# EAGLE board logic (EAGLE 9.2.2)
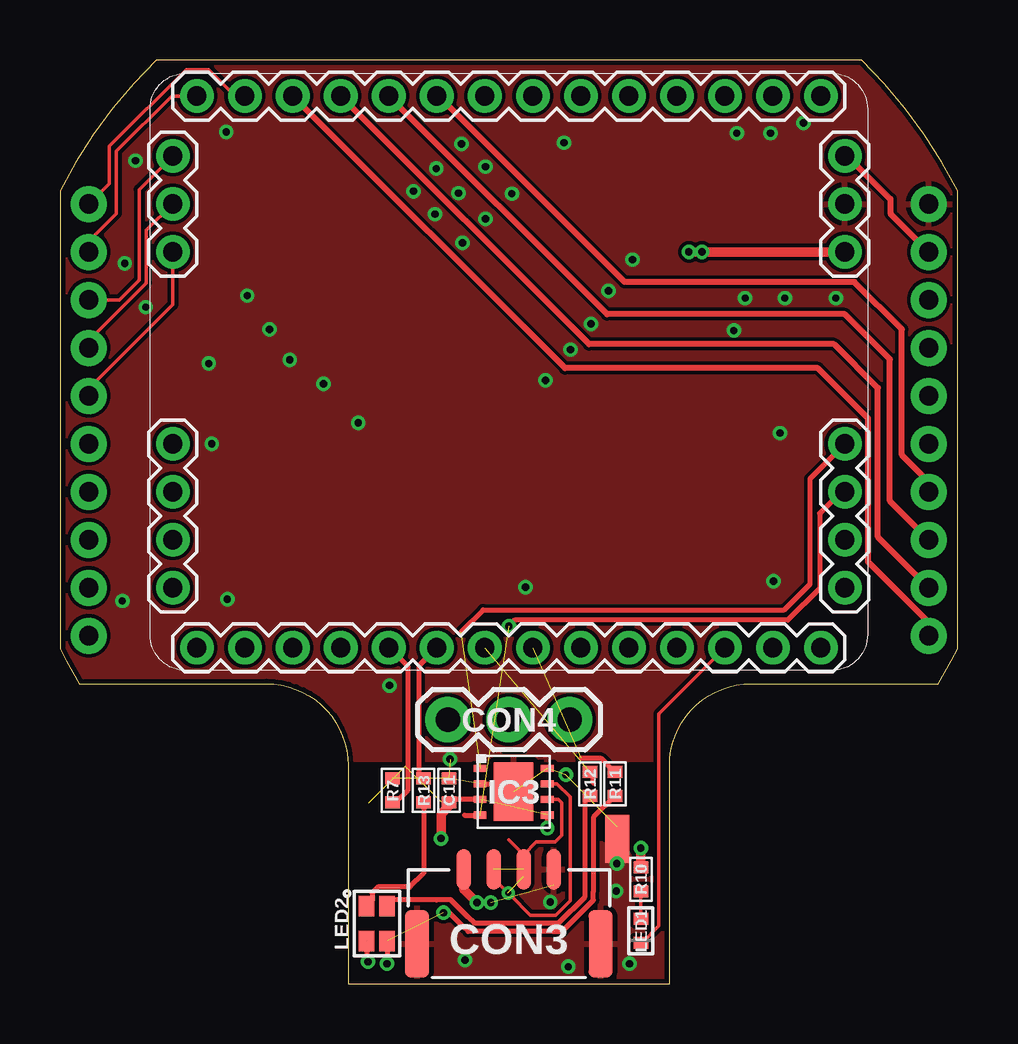
[diagram p0: board, top side]
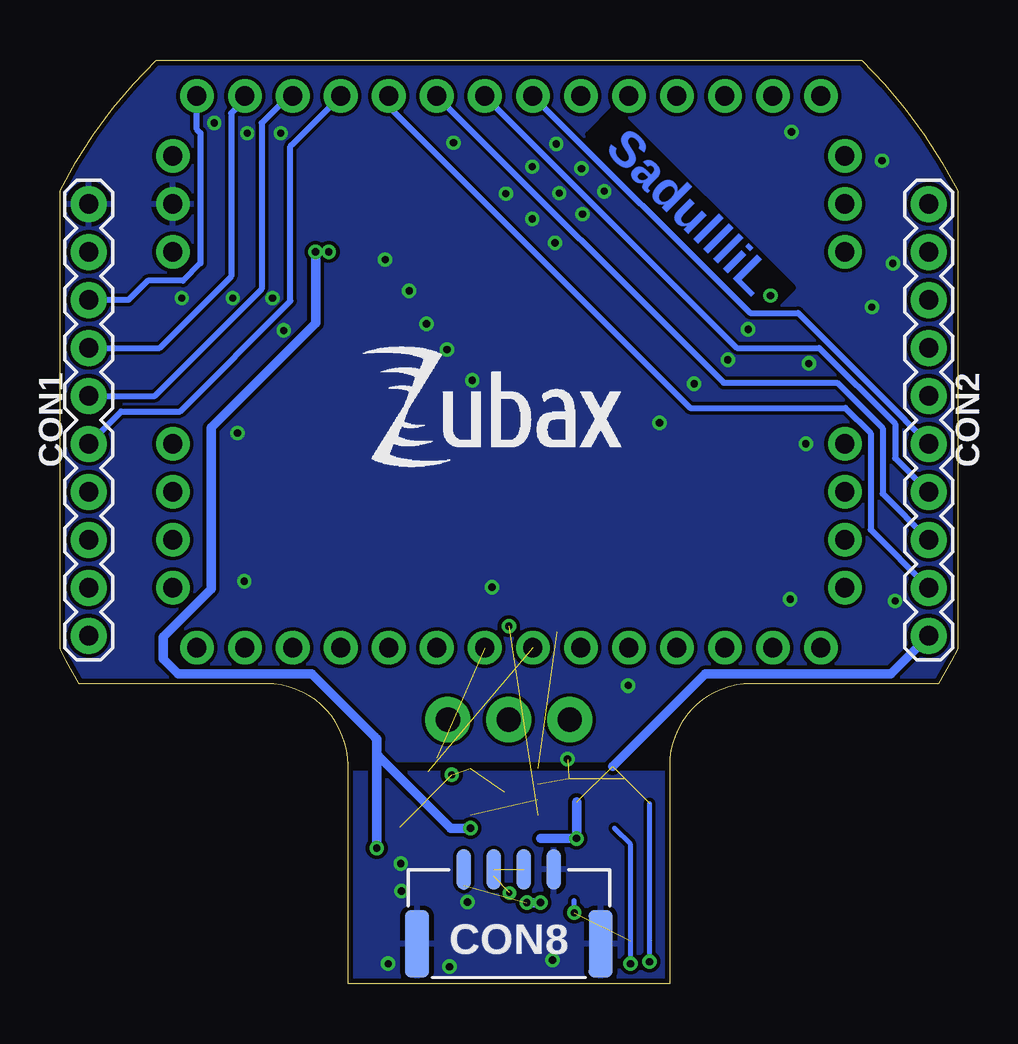
[diagram p1: board, bottom side, seen from below]

Size 37.4 x 38.5 mm. Coordinates in mm from the lower left corner, seen from the top.
Outline: 12,9.1 12,0 25.4,0 25.4,9.1 arc-90 28.8,12.5 36.59,12.5 arc5 37.4,13.94 37.4,33.06 arc19 33.4,38.5 4,38.5 arc19 0,33.06 0,13.94 arc5 0.81,12.5 8.6,12.5 arc-90 12,9.1
Copper layers (1*16): Top 0.035mm / dielectric 0.5mm / Bottom 0.035mm
Design rules "myxa *": minimum track width 0.15mm, minimum drill 0.2mm, track to track 0.15mm, track to pad 0.15mm, pad to pad 0.15mm, via to via 0.15mm, smd to smd 0.15mm, copper to edge 0.2mm, drill to drill 0.2mm, minimum pad ring 0.125mm, minimum via ring 0.125mm, stop-mask expansion 1mil, vias tented up to drill 0.31mm, thermal gap 8mil
Net classes: 1 HV: clearance 0.25 mm to class 0, clearance 0.25 mm
tRestrict: 2 lines

## Footprints (pad centres in the part's own frame; a part is rotated, then mirrored left to right if it is on the bottom)
C0402 = smd 0.5 x 0.6: 1 -0.5,0; 2 0.5,0
1X10-PTH_2 = drill 0.8 pad 1.5: 1 -9,0; 2 -7,0; 3 -5,0; 4 -3,0; 5 -1,0; 6 1,0; 7 3,0; 8 5,0; 9 7,0; 10 9,0
JST_GH-4P-RA = smd 0.6 x 1.7: 1 1.875,-2.91; 2 0.625,-2.91; 3 -0.625,-2.91; 4 -1.875,-2.91 | smd 1 x 2.8: M$0 -3.825,0.19; M$1 3.825,0.19
1X03-PTH-2.54-RA = drill 1.016 pad 1.88: 1 -2.54,0; 2 0,0; 3 2.54,0
SOT782-1 = smd 0.525 x 0.3: 1 -1.4,0.975; 2 -1.4,0.325; 3 -1.4,-0.325; 4 -1.4,-0.975; 5 1.4,-0.975; 6 1.4,-0.325; 7 1.4,0.325; 8 1.4,0.975 | smd 1.65 x 2.45: PAD 0,0
0402_LED = smd 0.5 x 0.6: A 0.5,0; C -0.5,0
LITE_ON_RGB_LED = smd 0.65 x 0.85: + -0.425,-0.725; B 0.425,-0.725; G 0.425,0.725; R -0.425,0.725
MITOHONDRIQUE = drill 0.8 pad 1.4: 1 -5,14; 2 -7,14; 3 -9,14; 4 -11.5,13; 5 -11.5,11; 6 -11.5,9; 7 -11.5,7; 8 -11.5,5; 9 -11.5,3; 10 -11.5,1; 11 -11.5,-1; 12 -11.5,-3; 13 -11.5,-5; 14 -11.5,-7; 15 -11.5,-9; 16 -11.5,-11; 17 -11.5,-13; 18 -9,-14; 19 -7,-14; 20 -5,-14; 21 3,-14; 22 5,-14; 23 7,-14; 24 9,-14; 25 11.5,-13; 26 11.5,-11; 27 11.5,-9; 28 11.5,-7; 29 11.5,-5; 30 11.5,-3; 31 11.5,-1; 32 11.5,1; 33 11.5,3; 34 11.5,5; 35 11.5,7; 36 11.5,9; 37 11.5,11; 38 11.5,13; 39 9,14; 40 7,14; 41 5,14; 42 3,14
R0402 = smd 0.5 x 0.6: 1 -0.5,0; 2 0.5,0
CONNECTION = smd 1 x 1: P$1 -0.5,0; P$2 0.5,0

## Placement (x,y rotation side)
C11  0.1µF  [C0402]  16.2,8.05 90 top
CON1  PINHEAD_1X10-2  [1X10-PTH_2]  36.2,23.5 90 bottom
CON2  PINHEAD_1X10-2  [1X10-PTH_2]  1.2,23.5 270 bottom
CON3  CON-4P-JST_GH-RA  [JST_GH-4P-RA]  18.7,1.85 180 top
CON4  PINHEAD_1X03-2.54-RA  [1X03-PTH-2.54-RA]  18.7,11 0 top
CON8  CON-4P-JST_GH-RA  [JST_GH-4P-RA]  18.7,1.85 180 bottom
IC3  TJA1051  [SOT782-1]  18.9,8 0 top
LED1  GREEN  [0402_LED]  24.2,2.2 90 top
LED2  LTST-C19HE1WT  [LITE_ON_RGB_LED]  13.2,2.5 0 top
MODULE2  MITOHONDRIQUE-TH  [MITOHONDRIQUE]  18.7,25.5 270 top
R7  1K  [R0402]  13.85,8.05 90 top
R10  1K  [R0402]  24.2,4.35 90 top
R11  1K  [R0402]  23.12,8.32 90 top
R12  1K  [R0402]  22.07,8.32 90 top
R13  1K  [R0402]  15.15,8.05 90 top
U$1  [ZUBAX_LOGO_5X10]  24.88,21.35 0 bottom
U$2  CONNECTION  [CONNECTION]  23.23,6.02 270 top

## Library data of the parts
C11 = C_digikey; DIGIKEY#: 490-3261-1-ND; MANF: Murata Electronics North America; MANF#: GRM155R71C104KA88D; OPERATING_TEMP: -55°C ~ 125°C; PACKAGE: 0402; TC: X7R; TOLERANCE: +-10%; VOLTAGE: 16V
CON1 CON2 CON4 = pinhead
CON3 CON8 = Connectors; DIGIKEY#: 455-1566-1-ND; MANF: JST Sales America Inc; MANF#: SM04B-GHS-TB(LF)(SN)
IC3 = myxa_masterlib; DIGIKEY#: 568-8686-2-ND; MANF: NXP Semiconductors; MANF#: TJA1051TK/3,118
LED1 = myxa_masterlib; COLOR: GREEN; DIGIKEY#: 511-1652-1-ND; MANF: Rohm Semiconductor; MANF#: SML-P11MTT86
LED2 = myxa_masterlib; DIGIKEY#: 160-2162-1-ND; MANF: Lite-On Inc; MANF#: LTST-C19HE1WT
MODULE2 = zubax_modules; MANF: Zubax Robotics; MANF#: Mitochondrik
R7 R10-R13 = R_digikey; DIGIKEY#: 311-1.00KLRCT-ND; MANF: Yageo; MANF#: RC0402FR-071KL; PACKAGE: 0402; TOLERANCE: 1%
U$1 = pixhawk_esc_1.5_master_lib
U$2 = usb2can_master_lib; BOM: EXCLUDE

## Nets
CAN1_LED: LED1.C MODULE2.36
CAN1_RX: IC3.4 MODULE2.41
CAN1_TX: IC3.1 MODULE2.42
GND: C11.2 CON1.10 IC3.2 IC3.8 IC3.PAD MODULE2.2 R7.2 U$2.P$1
GNDD: CON3.4 CON3.M$0 CON3.M$1 CON8.4 CON8.M$0 CON8.M$1 U$2.P$2
LED_GREEN: MODULE2.31 R12.2
LED_RED: MODULE2.30 R13.2
N$1: CON2.3 MODULE2.18
N$2: CON2.2 MODULE2.17
N$3: CON2.1 MODULE2.16
N$4: CON2.4 MODULE2.19
N$5: CON1.1 MODULE2.15
N$6: MODULE2.32 R11.2
N$7: LED1.A R10.1
N$18: MODULE2.29 R7.1
N$23: CON3.2 CON8.2 IC3.7
N$28: CON3.1 CON8.1
N$35: CON3.3 CON8.3 IC3.6
N$58: LED2.R R13.1
N$59: LED2.G R12.1
N$60: LED2.B R11.1
PHASE_A [HV]: CON1.7 MODULE2.5
PHASE_A_GATE_HIGH [HV]: CON1.8 MODULE2.4
PHASE_A_GATE_LOW: CON1.6 MODULE2.6
PHASE_A_GND: CON1.5 MODULE2.7
PHASE_B [HV]: CON1.3 MODULE2.13
PHASE_B_GATE_HIGH [HV]: CON1.4 MODULE2.12
PHASE_B_GATE_LOW: CON1.2 MODULE2.14
PHASE_C [HV]: CON2.8 MODULE2.9
PHASE_C_GATE_HIGH [HV]: CON2.9 MODULE2.8
PHASE_C_GATE_LOW: CON2.7 MODULE2.10
PHASE_C_GND: CON2.6 MODULE2.11
TEMPERATURE_SENSOR: CON2.5 MODULE2.20
VDC [HV]: CON1.9 MODULE2.3
VDD_5V: C11.1 CON2.10 IC3.3 IC3.5 LED2.+ MODULE2.1 R10.2

## Tracks (layer width: path | path; a pad name or v marks a point on that pad's centre or on a via)
CAN1_LED
  Top 0.15: MODULE2.36 26.67,12.97 24.95,11.25 24.95,2.4 24.25,1.7 LED1.C
CAN1_RX  (via drill 0.3 pad 0.6)  (1 unrouted)
  Top 0.2: MODULE2.41 32.55,20.5 31.65,19.6 31.65,16.48 30.32,15.15 18.95,15.15 v18.7,14.9 | 16.86,7.02 IC3.4
CAN1_TX  (1 unrouted)
  Top 0.2: 16.7,14.65 17.62,15.57 30.17,15.57 31.25,16.65 31.25,21.05 MODULE2.42
GND  (via drill 0.3 pad 0.6)  (6 unrouted)
  Top 0.2: IC3.2 18.57,8.32 IC3.PAD
  other vias: 21,35.05 13.72,12.43 16.25,9.35 22.85,28.88 18.82,32.92 17.72,31.88 16.77,30.88 10.97,25 9.57,26 15.62,32.08 16.6,32.95 17.72,34.05 16.72,35 15.67,33.98 14.72,33.02 8.72,27.27 6.2,25.85 12.42,23.38 6.97,16.02 19.4,16.52 29.73,16.77 30,22.95 28.55,28.57 28.07,27.23 30.2,28.57 32.33,28.57 29.6,35.45 28.2,35.45 30.98,35.88 22.12,27.5 21.27,26.43 20.22,25.15 23.85,30.18 7.8,28.68 3.57,28.2 2.7,30.02 3.15,34.3 6.92,35.5 6.32,22.5 2.6,15.95 21.07,8.7
  pour Bottom: 39.7,44.5 -2.3,44.5 -2.3,9.3 39.7,9.3
  pour Top: -2.3,44.5 39.7,44.5 39.7,9.3 -2.3,9.3
GNDD  (via drill 0.3 pad 0.6)
  other vias: 23.17,3.85 16.88,0.98 23.73,0.82 21.18,0.7 23.2,5 20.43,3.4
  pour Top: 12.2,8.78 25.2,8.78 25.2,-0.5 12.2,-0.5
  pour Bottom: 25.2,8.78 12.2,8.78 12.2,0.1 25.2,0.1
LED_GREEN  (1 unrouted)
  Top 0.2: R12.2 22.22,8.68 22.22,8.35
LED_RED
  Top 0.2: R13.2 14.95,8.75 14.95,13.25 MODULE2.30
N$1
  Top 0.15: MODULE2.18 3.3,33.1 3.3,29.32 2.48,28.5 CON2.3
N$2
  Top 0.15: MODULE2.17 4.65,37 2.35,34.7 2.35,32.1 1.2,30.95 CON2.2
N$3
  Top 0.15: MODULE2.16 7.3,37 6.2,38.1 5.25,38.1 2.05,34.9 2.05,33.35 CON2.1
N$4
  Top 0.15: CON2.4 1.2,26.8 3.6,29.2 3.6,31.4 MODULE2.19
N$5
  Top 0.25: CON1.1 36.2,15.05 33.67,17.57 33.67,23.55 31.58,25.65 21.05,25.65 MODULE2.15
N$6  (1 unrouted)
  Top 0.2: 21.7,9.4 22.52,9.4 23.1,8.82 R11.2
N$7
  Top 0.15: LED1.A R10.1
N$18
  Top 0.2: R7.1 13.97,7.55 14.5,8.07 14.5,13.2 MODULE2.29
N$23  (via drill 0.25 pad 0.55)  (1 unrouted)
  Top 0.15: CON3.2 18.07,4.36 v18.66,3.77 v18.68,3.77 18.77,3.68 19.6,2.85 20.65,2.85 21.25,3.45 21.25,6.68 21.25,7.78 20.7,8.32 IC3.7
  Bottom 0.15: CON8.2 19.32,4.48
N$28  (via drill 0.3 pad 0.6)  (1 unrouted)
  Top 0.4: CON3.1 16.82,3.93 v17.38,3.38
  Bottom 0.4: v17.38,3.38 v17.95,3.38 | 20.57,4.1 CON8.1
N$35  (1 unrouted)
  Top 0.15: CON3.3 19.32,4.98 19.32,5.38 | 19.32,5.38 18.7,6 | IC3.6 20.75,7.68 20.9,7.53 20.9,6.18 20.62,5.9 19.85,5.9 19.32,5.38
N$58
  Top 0.2: R13.1 15.15,4.6 14.57,4.02 13.25,4.02 13,3.77 13,3.45 LED2.R
N$59
  Top 0.2: R12.1 21.88,7.62 21.88,3.61 20.79,2.52 17.25,2.52 17.01,2.76 16.27,3.5 15.72,3.5 15.65,3.5 13.65,3.5 13.65,3.25 LED2.G
N$60  (via drill 0.3 pad 0.6)  (1 unrouted)
  Top 0.2: R11.1 22.22,6.93 22.22,3.85 22.22,3.47 20.93,2.18 20.55,2.18 17,2.18 16.8,2.38 16.22,2.95 v15.97,2.95 | LED2.B v13.62,0.82
  Bottom 0.2: v13.62,0.82 13.62,5.8 14.3,6.48 | v15.97,2.95 15.97,3.45
PHASE_A
  Bottom 0.25: CON1.7 33.25,26.5 30.27,29.48 30.27,36.27 29.7,36.85 MODULE2.5
PHASE_A_GATE_HIGH
  Bottom 0.25: CON1.8 34.55,28.5 33.75,29.3 32.27,29.3 31.55,30.02 31.55,35.45 31.7,35.6 MODULE2.4
PHASE_A_GATE_LOW
  Bottom 0.25: CON1.6 33.45,24.5 29,28.95 29,35.88 27.88,37 MODULE2.6
PHASE_A_GND
  Bottom 0.25: MODULE2.7 27.65,35.05 27.8,34.9 27.8,28.45 32.4,23.85 34.85,23.85 CON1.5
PHASE_B
  Top 0.25: CON1.3 34.58,20.12 34.58,26.02 32.7,27.9 22.8,27.9 MODULE2.13
PHASE_B_GATE_HIGH
  Top 0.25: CON1.4 36.2,20.91 35.08,22.03 35.08,27.27 33.1,29.25 23.52,29.25 15.77,37 MODULE2.12
PHASE_B_GATE_LOW
  Top 0.25: CON1.2 34.08,18.62 34.08,24.82 32.25,26.65 22.05,26.65 MODULE2.14
PHASE_C
  Bottom 0.25: MODULE2.9 9.75,25.05 5.02,25.05 3.12,23.15 3.12,20.43 CON2.8
PHASE_C_GATE_HIGH
  Bottom 0.25: MODULE2.8 23.7,36.55 11.15,24 4.68,24 3.62,22.95 3.62,18.93 CON2.9
PHASE_C_GATE_LOW
  Bottom 0.25: MODULE2.10 9.2,26.5 5.76,26.5 2.6,23.34 2.6,21.9 CON2.7
PHASE_C_GND
  Bottom 0.25: MODULE2.11 8.65,27.95 6.65,27.95 2.2,23.5 | 2.2,23.5 | 2.2,23.5 CON2.6
TEMPERATURE_SENSOR
  Top 0.15: MODULE2.20 4.7,28.3 1.2,24.8 CON2.5
VDC
  Top 0.25: MODULE2.3 32.8,34.5 34.6,32.7 34.6,32.1 CON1.9
VDD_5V  (via drill 0.3 pad 0.6)  (5 unrouted)
  Top 0.2: IC3.3 16.32,7.68 C11.1 | IC3.5 v20.3,6.48 | LED2.+ 12.77,0.97 v12.83,0.91
  Top 0.4: MODULE2.1 v26.75,30.5 v26.2,30.5 | R10.2 v24.2,5.65 | C11.1 16.2,7.4 15.88,7.07 v15.88,6.05
  Bottom 0.2: v12.83,0.91 12.83,7.51
  Bottom 0.4: v26.75,30.5 26.75,27.52 31.1,23.18 31.1,16.45 33.1,14.45 33.1,13.53 32.48,12.9 26.91,12.9 24.29,10.29 24.2,10.2 24.2,9.55 | CON2.10 2.79,12.9 10.52,12.9 14.38,9.05 | 17.38,6.05 v15.88,6.05 15.88,7.57 | v24.2,5.65 24.2,9.55 | 24.2,9.55 24.12,9.47 21.12,6.48 v20.3,6.48

## Text on the board
Bottom: SadullliL
Reference: PHASE_A_SHUNT_P | PHASE_A_SHUNT_N | PHASE_C_GND | PHASE_C_GATE_LOW | PHASE_C | PHASE_C_GATE_HIGH | PHASE_B_GND | PHASE_B_GATE_LOW | PHASE_B | PHASE_B_GATE_HIGH | PHASE_A_GND | PHASE_A_GATE_LOW | PHASE_A | PHASE_A_GATE_HIGH | PHASE_B_SHUNT_N | VDC | PHASE_B_SHUNT_P | GND | TEMPERATURE | 5V